# Altium PCB DeerDongle_design.PcbDoc
Units mil, origin at the board's own origin, x right, y up, seen from the top; angles counter-clockwise.
Board outline 2155.76 x 2258.02 mil, 4 copper layers (Top Layer, Mid Layer 1, Mid Layer 2, Bottom Layer), stack 46.063 mil thick; 17 components, 10 nets, 103 pads, 0 vias.
Unrouted connection lines stored in the file: 30.
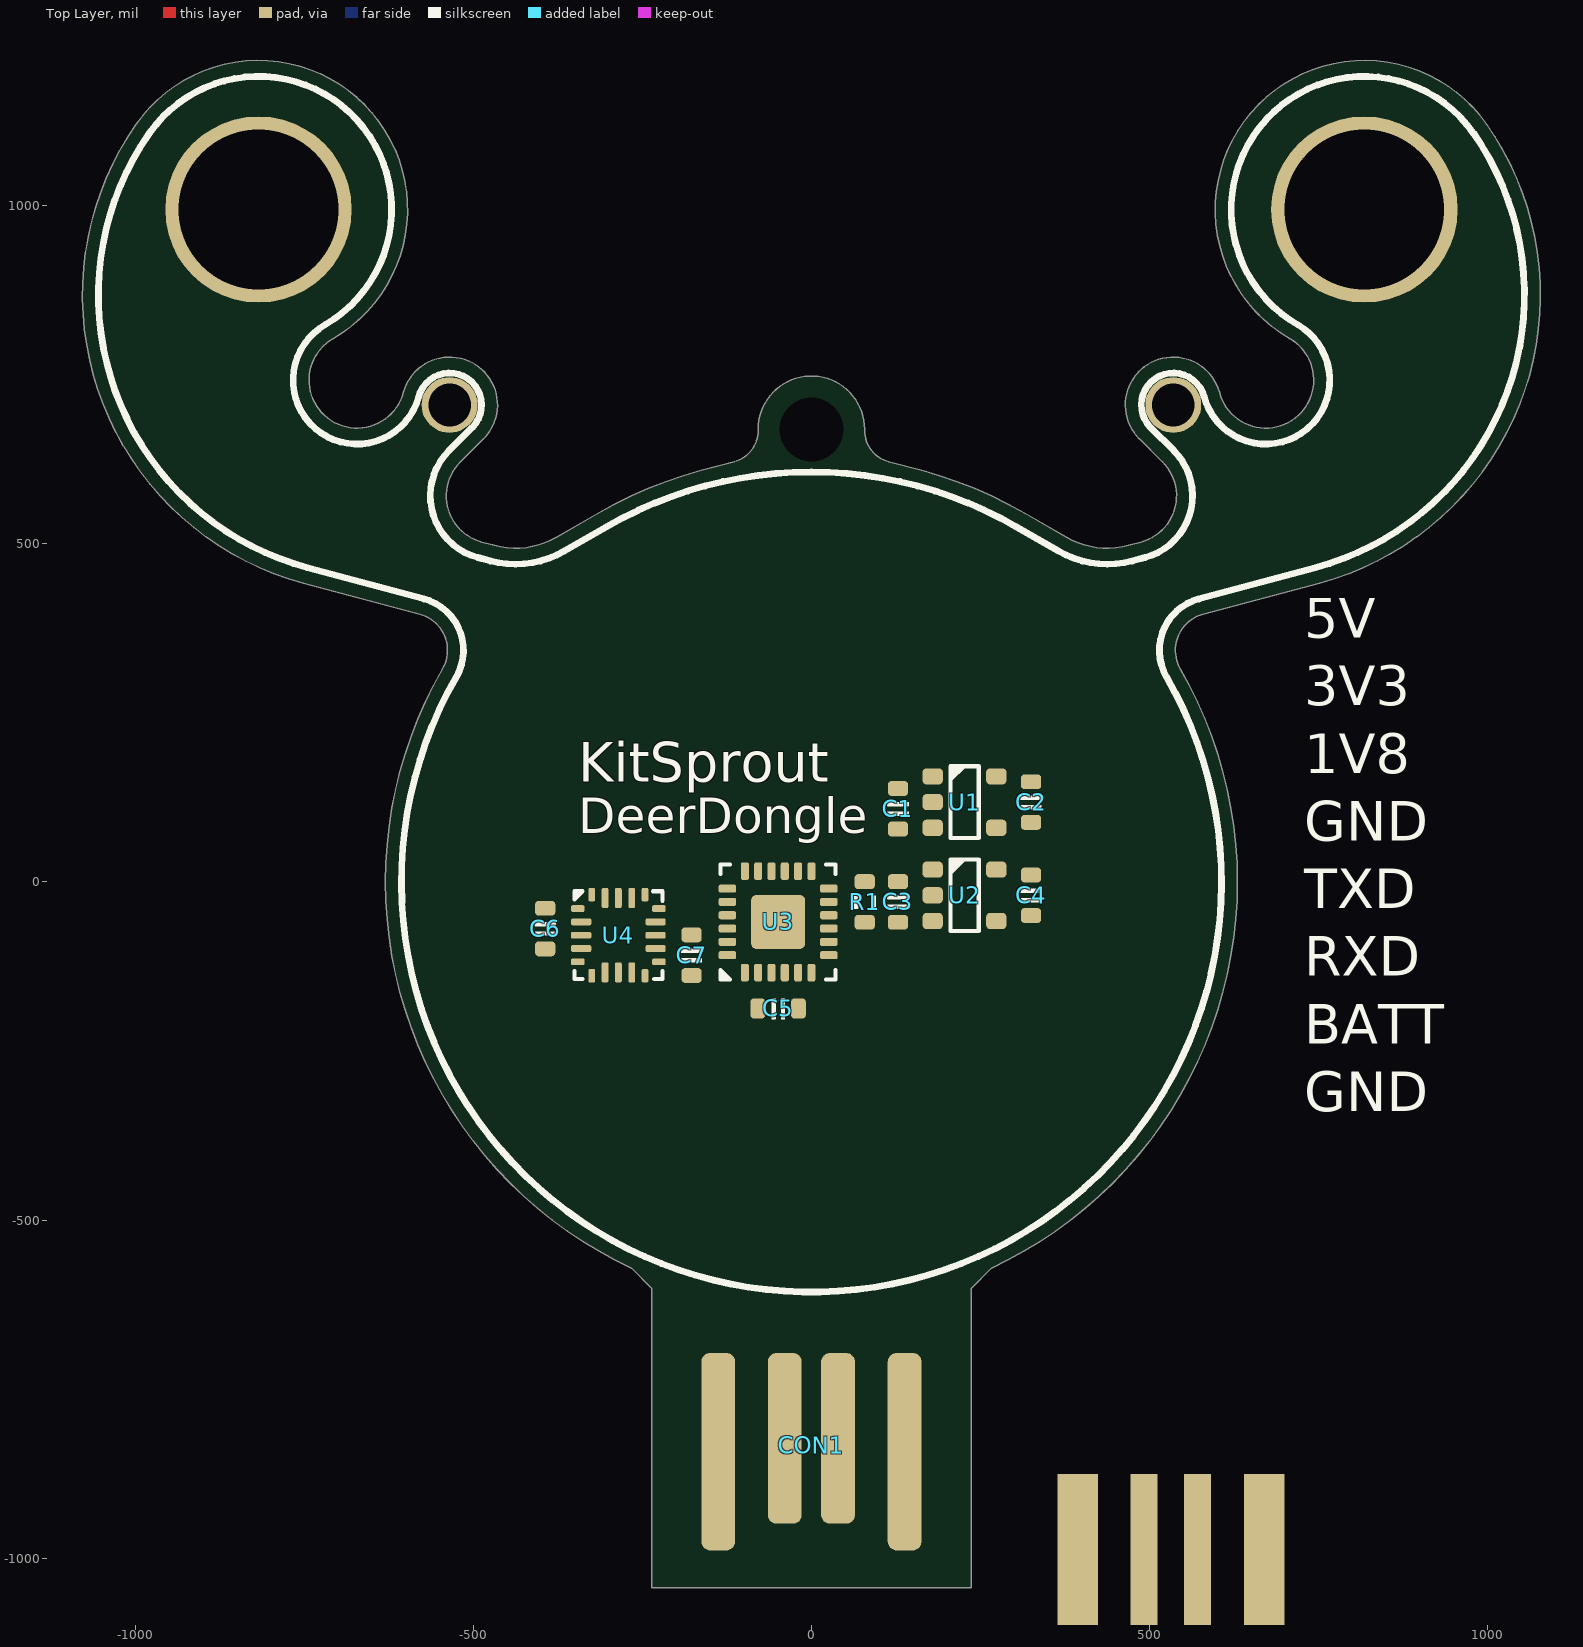
[diagram p0: Top Layer view]
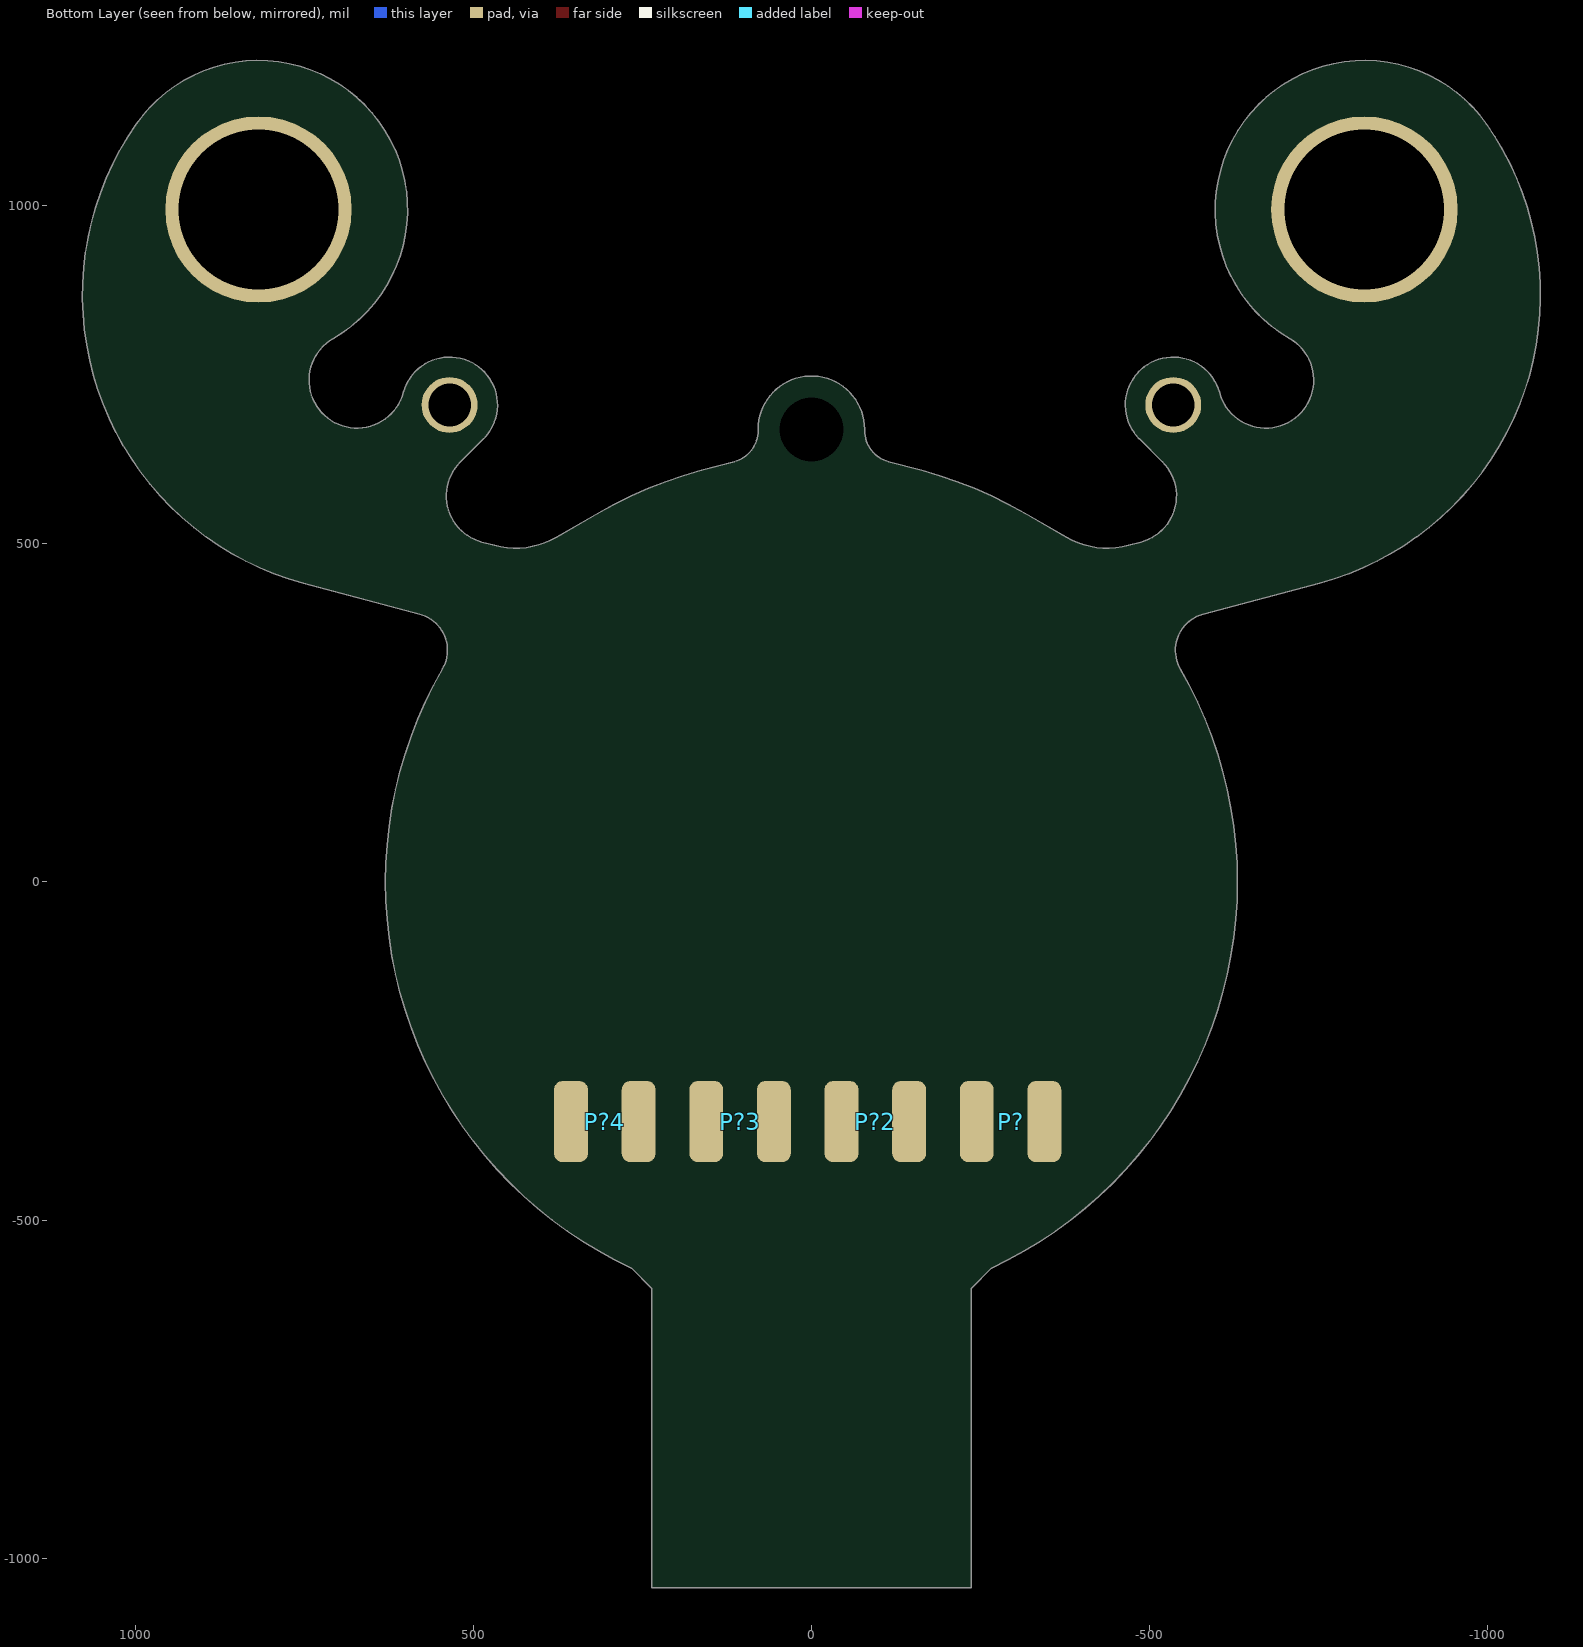
[diagram p1: Bottom Layer view, seen from below]

## Layer stack, top to bottom
Top Solder: solder mask 0.3937, Solder Resist, Dk 3.5
Top Layer: signal copper 1.378
Dielectric 2: prepreg 7.874, PP-023, Dk 4.5
Mid Layer 1: signal copper 0.689
Dielectric 1: core 26.1811, Core-003, Dk 4.3
Mid Layer 2: signal copper 0.689
Dielectric 3: prepreg 7.874, PP-023, Dk 4.5
Bottom Layer: signal copper 1.378
Bottom Solder: solder mask 0.3937, Solder Resist, Dk 3.5

## Board outline
-751.09,441.87 -579,395.76 cw(c-593.26,342.52) -545.53,314.96 ccw(c0,0) -266.22,-570.9 -236.22,-600.9 -236.22,-1043.31 236.22,-1043.31 236.22,-600.9 266.22,-570.9 ccw(c0,0) 545.53,314.96 cw(c593.26,342.52) 579,395.76 751.09,441.87 ccw(c636.97,867.79) 998.17,1120.71 ccw(c817.57,994.25) 707.33,803.31 cw(c671.9,741.94) 603.44,723.6 ccw(c534.99,705.26) 484.88,655.15 485.7,654.52 519.11,621.12 cw(c469,571.01) 487.34,502.56 468.73,497.57 cw(c437.49,614.17) 377.13,509.63 314.96,545.53 ccw(c0,0) 163.04,608.46 113.76,621.66 cw(c125.98,667.3) 78.74,667.3 78.74,669.29 ccw(c0,669.29) -78.74,669.29 -78.74,667.3 cw(c-125.98,667.3) -113.76,621.66 -163.04,608.46 ccw(c0,0) -314.96,545.53 -377.13,509.63 cw(c-437.49,614.17) -468.73,497.57 -487.34,502.56 cw(c-469,571.01) -519.11,621.12 -485.7,654.52 -484.88,655.15 ccw(c-534.99,705.26) -603.45,723.6 cw(c-671.9,741.94) -707.33,803.32 ccw(c-817.57,994.25) -998.17,1120.71 ccw(c-636.97,867.79)

## Design rules (kind name [scope] priority, off if disabled: settings)
BoardOutlineClearance [All] p1: gap=10 ignorepadtopadclearanceinfootprint=FALSE
Clearance "Clearance Polygon 10mil" [InPolygon] p1: gap=10 ignorepadtopadclearanceinfootprint=TRUE except(0: Arc-Hole Track-Hole SMDPad-Hole THPad-Hole Via-Hole Fill-Hole Poly-Hole Region-Hole Text-Hole)
Clearance "Clearance Top Layer 6mil" [OnLayer('Top Layer')] p2: gap=6 ignorepadtopadclearanceinfootprint=TRUE except(8: Arc-THPad Arc-Hole Track-THPad Track-Hole SMDPad-THPad SMDPad-Hole THPad-THPad THPad-Hole Via-Hole Fill-Hole Poly-Hole Region-Hole Text-Hole; 10: Arc-Text Track-Text SMDPad-Text THPad-Text Via-Text Fill-Text Poly-Text Region-Text Text-Text)
Clearance "Clearance Top Layer 5mil" [OnLayer('Top Layer')] p3 off: gap=5 ignorepadtopadclearanceinfootprint=TRUE except(8: Arc-THPad Arc-Hole Track-THPad Track-Hole SMDPad-THPad SMDPad-Hole THPad-THPad THPad-Hole Via-Hole Fill-Hole Poly-Hole Region-Hole Text-Hole; 10: Arc-Text Track-Text SMDPad-Text THPad-Text Via-Text Fill-Text Poly-Text Region-Text Text-Text)
Clearance "Clearance Bottom Layer 6mil" [OnLayer('Bottom Layer')] p4: gap=6 ignorepadtopadclearanceinfootprint=TRUE except(8: Arc-THPad Arc-Hole Track-THPad Track-Hole SMDPad-THPad SMDPad-Hole THPad-THPad THPad-Hole Via-Hole Fill-Hole Poly-Hole Region-Hole Text-Hole; 10: Arc-Text Track-Text SMDPad-Text THPad-Text Via-Text Fill-Text Poly-Text Region-Text Text-Text)
Clearance "Clearance Bottom Layer 5mil" [OnLayer('Bottom Layer')] p5 off: gap=5 ignorepadtopadclearanceinfootprint=TRUE except(8: Arc-THPad Arc-Hole Track-THPad Track-Hole SMDPad-THPad SMDPad-Hole THPad-THPad THPad-Hole Via-Hole Fill-Hole Poly-Hole Region-Hole Text-Hole; 10: Arc-Text Track-Text SMDPad-Text THPad-Text Via-Text Fill-Text Poly-Text Region-Text Text-Text)
Clearance "Clearance 6mil" [All] p6: gap=6 ignorepadtopadclearanceinfootprint=TRUE except(8: Arc-THPad Arc-Hole Track-THPad Track-Hole SMDPad-THPad SMDPad-Hole THPad-THPad THPad-Hole Via-Hole Fill-Hole Poly-Hole Region-Hole Text-Hole; 10: Arc-Text Track-Text SMDPad-Text THPad-Text Via-Text Fill-Text Poly-Text Region-Text Text-Text)
Clearance "Clearance 5mil" [All] p7 off: gap=5 ignorepadtopadclearanceinfootprint=TRUE except(8: Arc-THPad Arc-Hole Track-THPad Track-Hole SMDPad-THPad SMDPad-Hole THPad-THPad THPad-Hole Via-Hole Fill-Hole Poly-Hole Region-Hole Text-Hole; 10: Arc-Text Track-Text SMDPad-Text THPad-Text Via-Text Fill-Text Poly-Text Region-Text Text-Text)
Clearance "Clearance 4mil" [All] p8 off: gap=5 ignorepadtopadclearanceinfootprint=TRUE except(4: Arc-Arc Arc-Track Arc-SMDPad Track-Track Track-SMDPad SMDPad-SMDPad; 8: Arc-THPad Arc-Hole Track-THPad Track-Hole SMDPad-THPad SMDPad-Hole THPad-THPad THPad-Hole Via-Hole Fill-Hole Poly-Hole Region-Hole Text-Hole; 10: Arc-Text Track-Text SMDPad-Text THPad-Text Via-Text Fill-Text Poly-Text Region-Text Text-Text)
ComponentClearance [All] p1: gap=0 collisioncheckmode=3 verticalgap=0 showdistances=FALSE
Height [All] p1: minheight=0 maxheight=5000 prefheight=500
HoleSize [All] p1: absolutevalues=TRUE maxlimit=248.03 minlimit=8 maxpercent=80.000 minpercent=20.000
MinimumAnnularRing [All] p1: minimumring=3
MinimumSolderMaskSliver [All] p1: minsoldermaskwidth=0
PlaneConnect [All] p1: pad.planeconnectstyle=Relief pad.reliefexpansion=20 pad.reliefentries=4 pad.reliefconductorwidth=10 pad.reliefairgap=10 via.planeconnectstyle=Direct via.reliefexpansion=20 via.reliefentries=4 via.reliefconductorwidth=10 via.reliefairgap=10
PolygonConnect [All] p1: thpad.connectstyle=Relief thpad.reliefconductorwidth=10 thpad.reliefentries=4 thpad.polygonreliefangle="90 Angle" thpad.airgapwidth=10 smdpad.connectstyle=Relief smdpad.reliefconductorwidth=10 smdpad.reliefentries=4 smdpad.polygonreliefangle="90 Angle" smdpad.airgapwidth=10 via.connectstyle=Direct via.reliefconductorwidth=10 via.reliefentries=4 via.polygonreliefangle="90 Angle" via.airgapwidth=10
RoutingCorners [All] p1: cornerstyle=Round minsetback=100 maxsetback=100
RoutingVias [All] p1: holewidth=20 width=40 viastyle="Through Hole" minholewidth=8 minwidth=18 maxholewidth=40 maxwidth=80
SMDEntry [All] p1: side=TRUE corner=TRUE anyangle=TRUE
SMDToCorner [All] p1: distance=0
SMDToPlane [All] p1: distance=0
SilkToSilkClearance [All] p1: silktosilkclearance=4
SilkToSolderMaskClearance [IsPad] p1: minsilkscreentomaskgap=0 clearancetoexposedcopper=TRUE
SolderMaskExpansion [All] p1: expansion=4 istentingtop=FALSE
UnRoutedNet [All] p1: checkbadconnections=TRUE
ViasUnderSMD [All] p1: allowed=TRUE
Width "Width 6mil" [All] p1: maxlimit=100 minlimit=3.5 preferedwidth=15 toplayer_minwidth=6 bottomlayer_minwidth=6 minimp=50.000000 maximp=50.000000 favimp=50.000000
Width "Width 5mil" [All] p2 off: maxlimit=100 minlimit=3.5 preferedwidth=15 toplayer_minwidth=5 bottomlayer_minwidth=5 minimp=50.000000 maximp=50.000000 favimp=50.000000
21 further rules are at their usual default settings.

## Classes and differential pairs
component class DeerDongle: C1 C2 C3 C4 C5 C6 C7 CON1 P? R1 U1 U2 U3 U4

## Components (designator, comment, footprint, x,y, rotation, side; value= is the part's Value field where it differs from the comment)
C1 "C0603" CAP_0603 127.95,108.27 r270 top value=10uF
C2 "C0603" CAP_0603 324.8,118.11 r90 top value=4.7uF
C3 "C0603" CAP_0603 127.95,-29.53 r270 top value=10uF
C4 "C0603" CAP_0603 324.8,-19.68 r90 top value=4.7uF
C5 "C0603" CAP_0603 -49.21,-187.01 r0 top value=0.1uF
C6 "C0603" CAP_0603 -393.7,-68.9 r270 top value=0.1uF
C7 "C0603" CAP_0603 -177.17,-108.27 r90 top value=0.1uF
CON1 "USB_Plug_TypeA" USB_TypeA_Plug_PCB 0,-807.09 r180 top value="Type A"
P? "HDR1x2" HDR1X2_2.54_180H -244.49,-354.33 r90 bottom value=2.54
P?2 "HDR1x2" HDR1X2_2.54_180H -44.49,-354.33 r90 bottom value=2.54 (schematic designator P?)
P?3 "HDR1x2" HDR1X2_2.54_180H 155.51,-354.33 r90 bottom value=2.54 (schematic designator P?)
P?4 "HDR1x2" HDR1X2_2.54_180H 355.51,-354.33 r90 bottom value=2.54 (schematic designator P?)
R1 "R0603" RES_0603 78.74,-29.53 r270 top value=1K
U1 "XC6220B331" SOT23-5 226.38,118.11 r0 top value=3.3V
U2 "XC6220B331" SOT23-5 226.38,-19.68 r0 top value=3.3V
U3 "CP2102N-24" QFN24_P0.5_4.0x4.0_H -49.21,-59.06 r90 top
U4 "STM32L011F" QFN20_P0.5_3.0x3.0 -285.43,-78.74 r0 top value=32MHz

## Footprints (in the part's own frame and the unit in brackets; to place one, negate y for a bottom-side part, rotate by r counter-clockwise, add the part's x,y. Pads: shape width x height; smd on the part's side, far side on the other; paste and mask are expansions set on the pad)
CAP_0603 [mil]
  rrect50% 22x30 smd: 1(-30,0) 2(30,0)
  silkscreen extent -9,-15 10,15, body extent -31,-16 31,16, height 31
HDR1X2_2.54_180H [mil]
  rrect50% 120x50 smd: 1(0,0) 2(0,-100)
  body extent -35,-150 406,50, height 61
QFN20_P0.5_3.0x3.0 [mil]
  rrect50% 20x10 smd: 1(-60,39.37) 5(-60,-39.37) 11(60,-39.37) 15(60,39.37)
  rrect50% 30x10 smd: 2(-55,19.69) 3(-55,0) 4(-55,-19.68) 12(55,-19.68) 13(55,0) 14(55,19.69)
  rrect50% 10x20 smd: 6(-39.37,-60) 10(39.37,-60) 16(39.37,60) 20(-39.37,60)
  rrect50% 10x30 smd: 7(-19.69,-55) 8(0,-55) 9(19.69,-55) 17(19.69,55) 18(0,55) 19(-19.69,55)
  silkscreen extent -65,-65 65,65, body extent -61,-61 61,61, height 24
QFN24_P0.5_4.0x4.0_H [mil]
  rrect50% 26x12 smd: 1(-75,49.21) 2(-75,29.53) 3(-75,9.84) 4(-75,-9.84) 5(-75,-29.53) 6(-75,-49.21) 13(75,-49.21) 14(75,-29.53) 15(75,-9.84) 16(75,9.84) 17(75,29.53) 18(75,49.21)
  rrect50% 12x26 smd: 7(-49.21,-75) 8(-29.53,-75) 9(-9.84,-75) 10(9.84,-75) 11(29.53,-75) 12(49.21,-75) 19(49.21,75) 20(29.53,75) 21(9.84,75) 22(-9.84,75) 23(-29.53,75) 24(-49.21,75)
  rrect20% 80x80 smd paste-100: 25(0,0)
  rrect30% 30x30 on Top Paste: ""(-20,-20) ""(-20,20) ""(20,20) ""(20,-20)
  silkscreen extent -85,-85 85,85, body extent -79,-79 79,79, height 30
RES_0603 [mil]
  rrect50% 22x30 smd: 1(-30,0) 2(30,0)
  silkscreen extent -10,-16 10,16, body extent -31,-16 31,16, height 18
SOT23-5 [mil]
  rrect50% 30x24 smd: 1(-47,38) 2(-47,0) 3(-47,-38) 4(47,-38) 5(47,38)
  silkscreen extent -21,-53 21,53, body extent -55,-57 55,57, height 45
USB_TypeA_Plug_PCB [mm]
  rrect50% 1.27x7.41 smd: 1(-3.5,0.897) 4(3.5,0.897)
  rrect50% 1.27x6.41 smd: 2(-1,0.397) 3(1,0.397)

## Part data
C1 C2 C3 C4 C5 C6 C7: library part Cap_0603, "Capacitor", Note=±10%, Specification="X7R, 16V", Type=0603
CON1: library part USB_TypeA_Plug, "USB", Type=Male
P? P?2 P?3 P?4: library part HDR1x2_2.54, "Header", Note=1x2, Type=DIP
R1: library part Res_0603, "Resistor", Note=±1%, Specification=1/10W, Type=0603
U1 U2: library part XC6220x_SOT25, "LDO", Manufacturer="Torex Semiconductor", Datasheet=https://www.torexsemi.com/file/xc6220/XC6220.pdf, Link=https://www.torexsemi.com/products/single-type-voltage-regulators/series/?name=xc6220, Note=6.5V, Specification=1000mA, Type=SOT23-5
U3: "USB2UART", Manufacturer="Silicon Laboratories", Datasheet=https://www.silabs.com/documents/public/data-sheets/cp2102n-datasheet.pdf, Link=https://www.silabs.com/interface/usb-bridges/usbxpress/device.cp2102n-gqfn24, Type="QFN24 P0.5"
U4: "MCU ST", Manufacturer=STMicroelectronics, Datasheet=https://www.st.com/resource/en/datasheet/stm32l011f3.pdf, Link=https://www.st.com/en/microcontrollers-microprocessors/stm32l011f3.html, Note=CortexM0, Specification="16K Flash, 2K SRAM", Type=QFN20

## Free pads (board coordinates)
  rect 60x296 smd paste-196.85: 1(669.29,-1023.62) 4(393.5,-1023.62)
  rect 40x256 smd paste-196.85: 2(570.87,-1003.75) 3(491.5,-1003.75)
  round 0 hole 78.74 unplated: ""(-3869.5,1337.64) ""(-1889.76,-102.36) ""(-1574.8,1023.62) ""(6169.9,2420.33) ""(7373.41,2420.33)
  round 275.59 hole 236.22: ""(-817.57,994.25) ""(817.57,994.25)
  round 82.68 hole 62.99: ""(-534.99,705.26) ""(534.99,705.26)
  round 0 hole 94.49 unplated: ""(0,669.29)
  round 0 hole 196.85 unplated: ""(5887.32,2709.32) ""(7655.98,2709.32)

## Nets (pads, with @x,y where several pads share a name; then routed paths per layer and width w, separated by ;. In a path a pad name is that pad's centre, name@x,y a point inside that pad or via, vN(x,y) a via of type N, cw(c..) or ccw(c..) an arc to the next point about the centre after c; other vN are vias at no path point)
+1V8: C4.2 U2.5
+3V3: C2.2 C6.2 C7.2 U1.5 U4.4 U4.13
+VIN: C1.2 C3.2 CON1.1 U1.1 U1.3 U2.1 U2.3 U3.8
D+: CON1.3 U3.3
D-: CON1.2 U3.4
GND: C1.1 C2.1 C3.1 C4.1 C5.1 C6.1 C7.1 CON1.4 U1.2 U2.2 U3.2 U4.12
NetC5_2: C5.2 U3.5
NetR1_2: R1.2 U3.9
RXD: U3.20 U4.15
TXD: U3.21 U4.14
pads on no net: P?2.1 P?2.2 P?3.1 P?3.2 P?4.1 P?4.2 P?.1 P?.2 R1.1 U1.4 U2.4 U3. U3.1 U3.6 U3.7 U3.10 U3.11 U3.12 U3.13 U3.14 U3.15 U3.16 U3.17 U3.18 U3.19 U3.22 U3.23 U3.24 U3.25 U4.1 U4.2 U4.3 U4.5 U4.6 U4.7 U4.8 U4.9 U4.10 U4.11 U4.16 U4.17 U4.18 U4.19 U4.20

## Other copper
Top Layer:
  pour cut-out: 294.5,-661.42 767.72,-661.42 767.72,-1212.6 294.5,-1212.6

## Silkscreen, mask and mechanical layers (free items; w line width, h text height)
Top Overlay:
  circle w2: c-1889.76,-887.36 r65
  lines w2: -3027.56,748.03 cw(c-2960.63,748.03) -2902.67,714.57 ; -2278.37,9.3 cw(c-2235.07,-15.7) -2202.93,-54 -2224.14,-75.21 ccw(c-2192,-113.52) -2227.36,-148.87 -2180.59,-195.64 cw(c-1889.76,-602.36) -1968.26,-108.56 ; -2278.33,9.37 -2288.33,-7.95 cw(c-2331.63,17.05) -2363.77,55.35 ccw(c-2460.19,170.26) -2590.09,245.26 ccw(c-2330.29,95.26) -2480.29,-164.55 -2274.69,-283.25 ccw(c-1889.76,-602.36) -2124.76,-1043.7 -2124.76,-1502.36 -1654.76,-1502.36 -1654.76,-1043.73 ; -2003.9,1071.19 cw(c-1936.97,1071.19) -1879.01,1037.73 ; -1968.26,-108.58 cw(c-1889.76,-102.36) -1811.27,-108.56 cw(c-1889.76,-602.36) -1599.65,-195.13 -1552.72,-148.2 ccw(c-1588.08,-112.85) -1555.94,-74.54 -1577.15,-53.33 cw(c-1545.01,-15.03) -1501.71,9.97 ; -1826.12,1607.23 -1849.74,1607.23 cw(c-1849.74,1654.47) -1894.14,1670.63 -1874.45,1704.72 ccw(c-1915.36,1728.35) -1962.61,1728.35 -1962.61,1708.66 cw(c-2025.6,1708.66) -2080.15,1740.16 ccw(c-2216.54,1818.9) -2374.02,1818.9 ccw(c-2059.06,1818.9) -2059.06,1503.94 -1822.83,1503.94 ; -1654.84,-1043.73 ccw(c-1889.76,-602.36) -1505.39,-282.58 -1299.8,-163.88 ccw(c-1449.8,95.92) -1189.99,245.92 ccw(c-1319.89,170.92) -1416.31,56.02 cw(c-1448.45,17.71) -1491.75,-7.29 -1501.75,10.03 ; -2417.32,2338.58 -2444.25,2238.1 -2675.44,2300.05 cw(c-2593.92,2604.28) -2851.92,2784.93 cw(c-2722.92,2694.6) -2644.18,2558.22 ccw(c-2612.69,2503.67) -2551.84,2487.37 -2546.75,2506.38 cw(c-2501.11,2494.15) -2467.71,2460.75 -2495.54,2432.91 ccw(c-2462.14,2399.5) -2474.37,2353.87 -2417.32,2338.58 ; -2417.32,2338.58 -1787.4,2338.58 ; -1787.4,2338.58 -1760.48,2238.1 -1529.28,2300.05 ccw(c-1610.8,2604.28) -1352.8,2784.93 ccw(c-1481.8,2694.61) -1560.54,2558.22 cw(c-1592.04,2503.67) -1652.88,2487.37 -1657.98,2506.38 ccw(c-1703.61,2494.15) -1737.02,2460.75 -1709.18,2432.91 cw(c-1742.59,2399.5) -1730.36,2353.87 -1787.4,2338.58
  lines w10: -3918.93,1350.89 cw(c-3869.5,1337.64) -3833.31,1301.45 ; -2839.43,535.11 -3078.78,535.11 cw(c-3078.78,830.38) -3356.25,931.37 cw(c-3226.76,884.24) -3129.33,786.81 ccw(c-3070.87,728.35) -2988.19,728.35 -2988.19,748.03 cw(c-2960.63,748.03) -2936.76,734.25 -2956.45,700.16 ccw(c-2898.49,666.69) -2898.49,599.76 -2839.43,599.76 ; -1815.77,858.27 -2055.12,858.27 cw(c-2055.12,1153.54) -2332.59,1254.53 cw(c-2203.1,1207.4) -2105.67,1109.97 ccw(c-2047.2,1051.51) -1964.53,1051.51 -1964.53,1071.19 cw(c-1936.97,1071.19) -1913.1,1057.41 -1932.79,1023.32 ccw(c-1874.82,989.85) -1874.82,922.92 -1815.77,922.92 ; -1622.05,1023.62 cw(c-1574.8,1023.62) -1533.89,1000 ; -535.81,637.82 ccw(c-469,571.01) -493.45,479.74 -474.85,474.76 ccw(c-437.49,614.17) -365.32,489.18 -303.15,525.07 cw(c0,0) 303.15,525.07 365.32,489.18 ccw(c437.49,614.17) 474.85,474.76 493.45,479.74 ccw(c469,571.01) 535.81,637.82 502.4,671.23 ; -535,638.45 -501.59,671.85 ccw(c-534.99,705.26) -580.63,717.49 cw(c-671.9,741.94) -719.14,823.77 ccw(c-817.57,994.25) -978.82,1107.16 ccw(c-636.97,867.79) -744.98,464.69 -572.88,418.58 cw(c-593.26,342.52) -525.07,303.15 ccw(c0,0) 525.07,303.15 cw(c593.26,342.52) 572.88,418.58 744.98,464.69 ccw(c636.97,867.79) 978.82,1107.16 ccw(c817.57,994.25) 719.14,823.77 cw(c671.9,741.94) 580.63,717.49 ccw(c534.99,705.26) 501.59,671.85 ; -793.86,2760.87 cw(c-680.99,2681.83) -612.09,2562.5 ccw(c-570.75,2490.9) -490.89,2469.5 -485.8,2488.51 cw(c-459.18,2481.38) -439.69,2461.89 -467.53,2434.05 ccw(c-420.2,2386.73) -437.53,2322.08 -409.6,2314.6 ccw(c-392.28,2379.24) -358.81,2321.28 -295.28,2357.96 cw(c-59.06,1948.82) 177.17,2357.96 240.7,2321.28 ccw(c274.17,2379.24) 291.49,2314.6 319.42,2322.08 ccw(c302.09,2386.73) 349.42,2434.05 321.58,2461.89 cw(c341.07,2481.38) 367.69,2488.51 372.78,2469.5 ccw(c452.64,2490.9) 493.98,2562.5 cw(c562.88,2681.83) 675.75,2760.87 cw(c433.88,2591.5) 510.3,2306.29 375.36,2270.13 ccw(c388.6,2220.7) 344.28,2195.1 350.09,2185.04 cw(c-59.06,1948.82) -468.2,2185.04 -462.39,2195.1 ccw(c-506.71,2220.7) -493.47,2270.13 -628.41,2306.29 cw(c-551.99,2591.5) -793.86,2760.87
  text "KitSprout" at -344.49,128.75 h100
  text "DeerDongle" at -344.49,54.22 h90
  text "5V / 3V3 / 1V8 / GND / TXD / RXD / BATT / GND" at 728.35,-358.13 h100
Mechanical 1:
  lines w2: -485.7,654.52 -519.11,621.12 ccw(c-469,571.01) -487.34,502.56 -468.73,497.57 ccw(c-437.49,614.17) -377.13,509.63 -314.96,545.53 cw(c0,0) -163.04,608.46 -113.76,621.66 ccw(c-125.98,667.3) -78.74,667.3 -78.74,669.29 cw(c0,669.29) 78.74,669.29 78.74,667.3 ccw(c125.98,667.3) 113.76,621.66 163.04,608.46 cw(c0,0) 314.96,545.53 377.13,509.63 ccw(c437.49,614.17) 468.73,497.57 487.34,502.56 ccw(c469,571.01) 519.11,621.12 485.7,654.52 ; -484.88,655.15 ccw(c-534.99,705.26) -603.45,723.6 cw(c-671.9,741.94) -707.33,803.32 ccw(c-817.57,994.25) -998.17,1120.71 ccw(c-636.97,867.79) -751.09,441.87 -579,395.76 cw(c-593.26,342.52) -545.53,314.96 ccw(c0,0) -266.22,-570.9 -236.22,-600.9 -236.22,-1043.31 236.22,-1043.31 236.22,-600.9 266.22,-570.9 ccw(c0,0) 545.53,314.96 cw(c593.26,342.52) 579,395.76 751.09,441.87 ccw(c636.97,867.79) 998.17,1120.71 ccw(c817.57,994.25) 707.33,803.31 cw(c671.9,741.94) 603.44,723.6 ccw(c534.99,705.26) 484.88,655.15 ; 1869.22,2321.71 ccw(c1902.63,2288.3) 1890.4,2242.67 1918.33,2235.19 1937.23,2230.12 1954.18,2239.91 2017.72,2276.59 cw(c2263.78,1850.39) 2509.84,2276.59 2573.38,2239.91 ccw(c2597,2280.82) 2609.23,2235.19 2637.16,2242.67 ccw(c2624.93,2288.3) 2658.33,2321.71 2630.49,2349.55 cw(c2663.9,2382.95) 2709.54,2395.18 2714.63,2376.17 ccw(c2775.48,2392.47) 2806.97,2447.02 cw(c2885.71,2583.41) 3014.71,2673.73 cw(c2756.71,2493.08) 2838.23,2188.85 2703.29,2152.69 ccw(c2711.44,2122.27) 2684.16,2106.52 2689.97,2096.46 cw(c2263.78,1850.39) 1837.59,2096.46 1843.4,2106.52 ccw(c1816.12,2122.27) 1824.27,2152.69 1689.33,2188.85 cw(c1770.85,2493.08) 1512.85,2673.73 cw(c1641.85,2583.41) 1720.59,2447.02 ccw(c1752.08,2392.47) 1812.93,2376.17 1818.02,2395.18 cw(c1863.66,2382.95) 1897.06,2349.55 1869.23,2321.71 ; 3847.12,2257.45 3880.53,2290.86 ; 3847.13,2257.45 ccw(c3897.23,2207.34) 3878.89,2138.89 3936.05,2123.57 ccw(c3948.28,2169.21) 3971.9,2128.29 4035.43,2164.98 cw(c4330.71,1653.54) 4625.98,2164.98 4689.52,2128.29 ccw(c4713.14,2169.21) 4725.37,2123.57 4782.52,2138.89 ccw(c4764.18,2207.34) 4814.29,2257.45 4780.88,2290.86 ; 3881.35,2291.48 ccw(c3831.24,2341.59) 3762.79,2359.93 cw(c3694.34,2378.27) 3658.9,2439.65 ccw(c3548.67,2630.58) 3368.07,2757.04 ccw(c3729.27,2504.12) 3615.14,2078.2 3816.97,2024.12 cw(c3808.82,1993.7) 3836.1,1977.95 3819.28,1948.82 ccw(c4330.71,1653.54) 4842.14,1948.82 4825.32,1977.95 cw(c4852.6,1993.7) 4844.45,2024.12 5046.28,2078.2 ccw(c4932.15,2504.12) 5293.35,2757.04 ccw(c5112.75,2630.58) 5002.51,2439.65 cw(c4967.08,2378.27) 4898.63,2359.93 ccw(c4830.18,2341.59) 4780.07,2291.48 ; 6219.19,2369.6 6185.78,2336.19 ccw(c6235.89,2286.08) 6217.55,2217.63 6223.7,2215.98 ccw(c6254.94,2332.58) 6315.29,2228.04 6417.32,2286.95 cw(c6771.65,1673.23) 7125.98,2286.95 7228.01,2228.04 ccw(c7288.37,2332.58) 7319.61,2215.98 7325.76,2217.63 ccw(c7307.41,2286.08) 7357.52,2336.19 7324.12,2369.6 ; 6220.01,2370.22 ccw(c6169.9,2420.33) 6101.45,2438.67 cw(c6032.99,2457.01) 5997.56,2518.39 ccw(c5887.32,2709.32) 5706.72,2835.78 ccw(c6067.92,2582.86) 5953.8,2156.94 6125.89,2110.83 cw(c6111.63,2057.59) 6159.36,2030.03 6157.93,2027.56 ccw(c6771.65,1673.23) 7385.37,2027.56 7383.94,2030.03 cw(c7431.68,2057.59) 7417.41,2110.83 7589.51,2156.94 ccw(c7475.38,2582.86) 7836.58,2835.78 ccw(c7655.98,2709.32) 7545.75,2518.39 cw(c7510.31,2457.01) 7441.86,2438.67 ccw(c7373.41,2420.33) 7323.3,2370.22 ; -3393.74,515.42 -3393.74,1042.98 -2839.43,1042.98 -2839.43,515.42 -3393.74,515.42 ; -2370.08,838.58 -1815.77,838.58 -1815.77,1366.14 -2370.08,1366.14 -2370.08,838.58
Mechanical 2:
  lines w2: -3449.54,168.13 -3473.16,127.21 ccw(c-3411.79,91.78) -3411.79,20.91 -3333.05,20.91 -3333.05,-105.97 -3650.85,-105.97 cw(c-3650.85,334.98) -4065.2,485.79 cw(c-3858.03,410.38) -3702.13,254.48 ccw(c-3652.02,204.38) -3581.15,204.38 cw(c-3510.29,204.38) -3448.91,168.94 ; -1915.74,1013.47 ccw(c-1874.82,989.85) -1874.82,942.61 -1815.77,942.61 -1815.77,838.58 -2055.12,838.58 cw(c-2055.12,1153.54) -2351.08,1261.27 cw(c-2203.1,1207.4) -2091.75,1096.05 ccw(c-2047.2,1051.51) -1984.21,1051.51 -1984.21,1071.19 cw(c-1936.97,1071.19) -1896.05,1047.57 -1915.74,1013.48 ; -4334.64,1756.5 cw(c-4154.04,1630.04) -4043.8,1439.11 ccw(c-4006.4,1374.32) -3934.14,1354.96 cw(c-3869.5,1337.64) -3822.17,1290.31 -3855.58,1256.91 ccw(c-3808.25,1209.58) -3825.57,1144.93 -3740.16,1122.05 -3774.53,993.78 -4087.56,1077.66 cw(c-3973.44,1503.58) -4334.64,1756.5 ; -3374.75,938.11 ccw(c-3078.78,830.38) -3078.78,515.42 -2839.43,515.42 -2839.43,619.45 -2898.49,619.45 cw(c-2898.49,666.69) -2939.4,690.31 -2919.72,724.41 ccw(c-2960.63,748.03) -3007.87,748.03 -3007.87,728.35 cw(c-3070.87,728.35) -3115.41,772.89 ccw(c-3226.76,884.24) -3374.75,938.11
Bottom Component:
  lines w5: 294.5,-1187.99 767.72,-1187.99 ; 294.5,-759.84 294.5,-1212.6 767.72,-1212.6 767.72,-759.84